# EAGLE board Magnificent Allis (EAGLE 9.7.0)

Size 282.06 x 154.19 mm. Coordinates in mm from the lower left corner, seen from the top.
Outline: 0,0 282.06,0 282.06,154.19 0,154.19 0,0
Copper layers (1*16): Top 0.035mm / dielectric 1.5mm / Bottom 0.035mm
Design rules "default": minimum track width 6mil, minimum drill 0.35mm, track to track 6mil, track to pad 6mil, pad to pad 6mil, via to via 6mil, smd to smd 6mil, copper to edge 40mil, drill to drill 6mil, minimum pad ring 10mil, minimum via ring 8mil, stop-mask expansion 4mil, vias tented up to drill 0mil, thermal gap 10mil

## Footprints (pad centres in the part's own frame; a part is rotated, then mirrored left to right if it is on the bottom)
HC-SR04 = drill 1.016 long: 1 -3.81,0; 2 -1.27,0; 3 1.27,0; 4 3.81,0
MQ-XX-SOCKET = drill 1.27: 1 -6.223,6.223; 2 -8.788,0; 3 -6.223,-6.223; 4 6.223,-6.223; 5 8.788,0; 6 6.223,6.223
LU-5-R = drill 0.8: 1 -6.35,-3.81; 5 3.81,-3.81; 6 6.35,-3.81; 7 6.35,3.81; 8 3.81,3.81; 12 -6.35,3.81
1X02 = drill 1.016 long: 1 -1.27,0; 2 1.27,0
MOTOR = drill 1.118 pad 3.15 octagon: + 2.54,0; - -2.54,0
BATTERY-GENERIC = drill 1.118 pad 3.15 octagon: + 2.54,0; - -2.54,0
28027 = drill 1.016 long: 1 -2.54,0; 2 0,0; 3 2.54,0
RESAD1016W63L850D250B = drill 0.83 pad 1.43: 1 -5.08,0; 2 5.08,0
GL5528 = drill 0.8 pad 1.4: 1 -1.702,0; 2 1.702,0
SWITCH-SPDT-PTH-8.5X3.7MM = drill 1.016 pad 1.88: 1 -2.54,0; 2 0,0; 3 2.54,0
ARDUINO-UNO-R3-SHIELD = drill 1.016 pad 1.88: 3.3V 24.13,-2.54; 5V 24.13,0; A0 24.13,12.7; A1 24.13,15.24; A2 24.13,17.78; A3 24.13,20.32; A4 24.13,22.86; A5 24.13,25.4; AREF -24.13,-13.97; D2 -24.13,20.32; D3 -24.13,17.78; D4 -24.13,15.24; D5 -24.13,12.7; D6 -24.13,10.16; D7 -24.13,7.62; D8 -24.13,3.81; D9 -24.13,1.27; D10 -24.13,-1.27; D11 -24.13,-3.81; D12 -24.13,-6.35; D13 -24.13,-8.89; GND@0 24.13,2.54; GND@1 24.13,5.08; GND@2 -24.13,-11.43; IOREF 24.13,-7.62; NC 24.13,-10.16; RES 24.13,-5.08; RX -24.13,25.4; SCL -24.13,-19.05; SDA -24.13,-16.51; TX -24.13,22.86; VIN 24.13,7.62
JHD-162A = drill 1.016 long: 1 -19.05,0; 2 -16.51,0; 3 -13.97,0; 4 -11.43,0; 5 -8.89,0; 6 -6.35,0; 7 -3.81,0; 8 -1.27,0; 9 1.27,0; 10 3.81,0; 11 6.35,0; 12 8.89,0; 13 11.43,0; 14 13.97,0; 15 16.51,0; 16 19.05,0

## Placement (x,y rotation side)
DIST1  DISTANCE-SENSOR-4PINHC-SR04  [HC-SR04]  158.43,22.23 0 top
GAS1  GAS-SENSORMQ-XX-SOCKET  [MQ-XX-SOCKET]  237.27,46.17 270 top
K1  RELAY-SPDT_LU-5-R  [LU-5-R]  230.34,119.63 180 top
L1  LIGHTBULB  [1X02]  244.08,147.92 0 top
M3  MOTOR_HDR  [MOTOR]  273.8,140.49 0 top
P1  BATTERYGENERIC  [BATTERY-GENERIC]  265.66,95.55 180 top
PIR1  PIR-SENSOR_28027  [28027]  204.79,37.94 0 top
R1  1k  [RESAD1016W63L850D250B]  146.76,96.87 90 top
R3  220  [RESAD1016W63L850D250B]  177.24,96.87 90 top
R4  1k  [RESAD1016W63L850D250B]  232.19,62.68 90 top
R5  PHOTOCELL_GL5528  [GL5528]  101.14,67.39 0 top
R6  1k  [RESAD1016W63L850D250B]  103.26,55.38 90 top
S1  TOGGLE  [SWITCH-SPDT-PTH-8.5X3.7MM]  256.47,146.5 0 top
U1  ARDUINO-UNO-R3-SHIELD  [ARDUINO-UNO-R3-SHIELD]  47.88,73.26 270 top
U3  LCD-16X2JHD-162A  [JHD-162A]  160.73,91.92 0 top

## Library data of the parts
DIST1 GAS1 K1 L1 M3 P1 PIR1 R1 R3-R6 S1 U1 U3 = Tinkercad

## Nets
M3_+: K1.6 L1.1 M3.+
M3_-: M3.- S1.2
P1+: K1.12 P1.+
P1-: L1.2 P1.- S1.1
U1_5V: DIST1.1 GAS1.4 GAS1.5 GAS1.6 PIR1.2 R3.2 R5.1 U1.5V U3.2
U1_A0: R6.1 U1.A0
U1_A1: GAS1.1 GAS1.3 R4.1 U1.A1
U1_D2: U1.D2 U3.14
U1_D3: U1.D3 U3.13
U1_D4: U1.D4 U3.12
U1_D5: U1.D5 U3.11
U1_D6: DIST1.3 U1.D6
U1_D7: DIST1.2 U1.D7
U1_D8: PIR1.1 U1.D8
U1_D11: U1.D11 U3.6
U1_D12: U1.D12 U3.4
U1_D13: K1.5 U1.D13
U1_GND: DIST1.4 GAS1.2 K1.8 PIR1.3 R1.2 R4.2 R5.2 R6.2 U1.GND@0 U1.GND@1 U1.GND@2 U3.1 U3.5 U3.16
U3_LED+: R3.1 U3.15
U3_VO: R1.1 U3.3

## Tracks (layer width: path | path; a pad name or v marks a point on that pad's centre or on a via)
M3_+  (2 unrouted)
M3_-  (1 unrouted)
P1+  (1 unrouted)
P1-  (2 unrouted)
U1_5V  (8 unrouted)
U1_A0  (1 unrouted)
U1_A1  (3 unrouted)
U1_D2  (1 unrouted)
U1_D3  (1 unrouted)
U1_D4  (1 unrouted)
U1_D5  (1 unrouted)
U1_D6  (1 unrouted)
U1_D7  (1 unrouted)
U1_D8  (1 unrouted)
U1_D11  (1 unrouted)
U1_D12  (1 unrouted)
U1_D13  (1 unrouted)
U1_GND  (13 unrouted)
U3_LED+  (1 unrouted)
U3_VO  (1 unrouted)